# EAGLE board Layout (EAGLE 6.5.0)
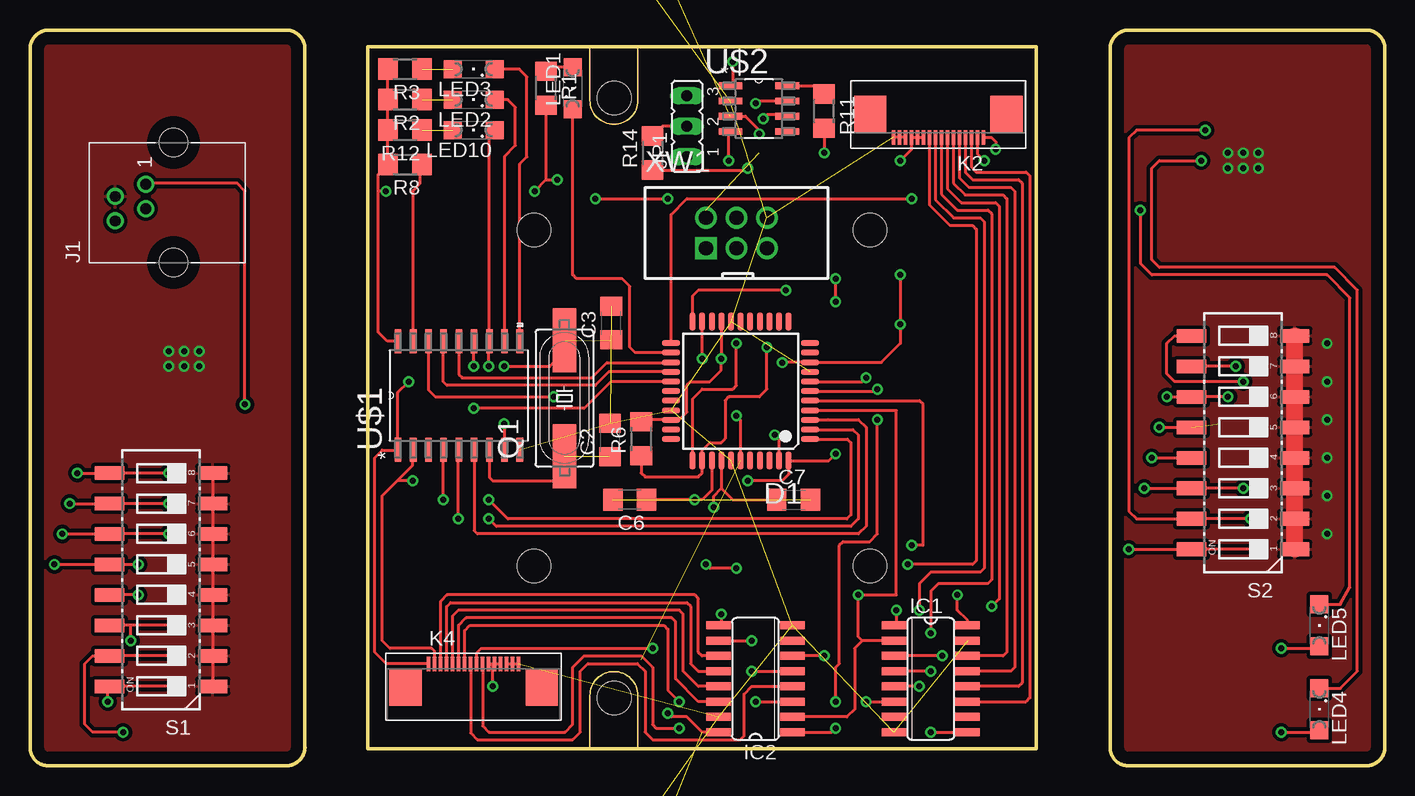
[diagram p0: board, top side]
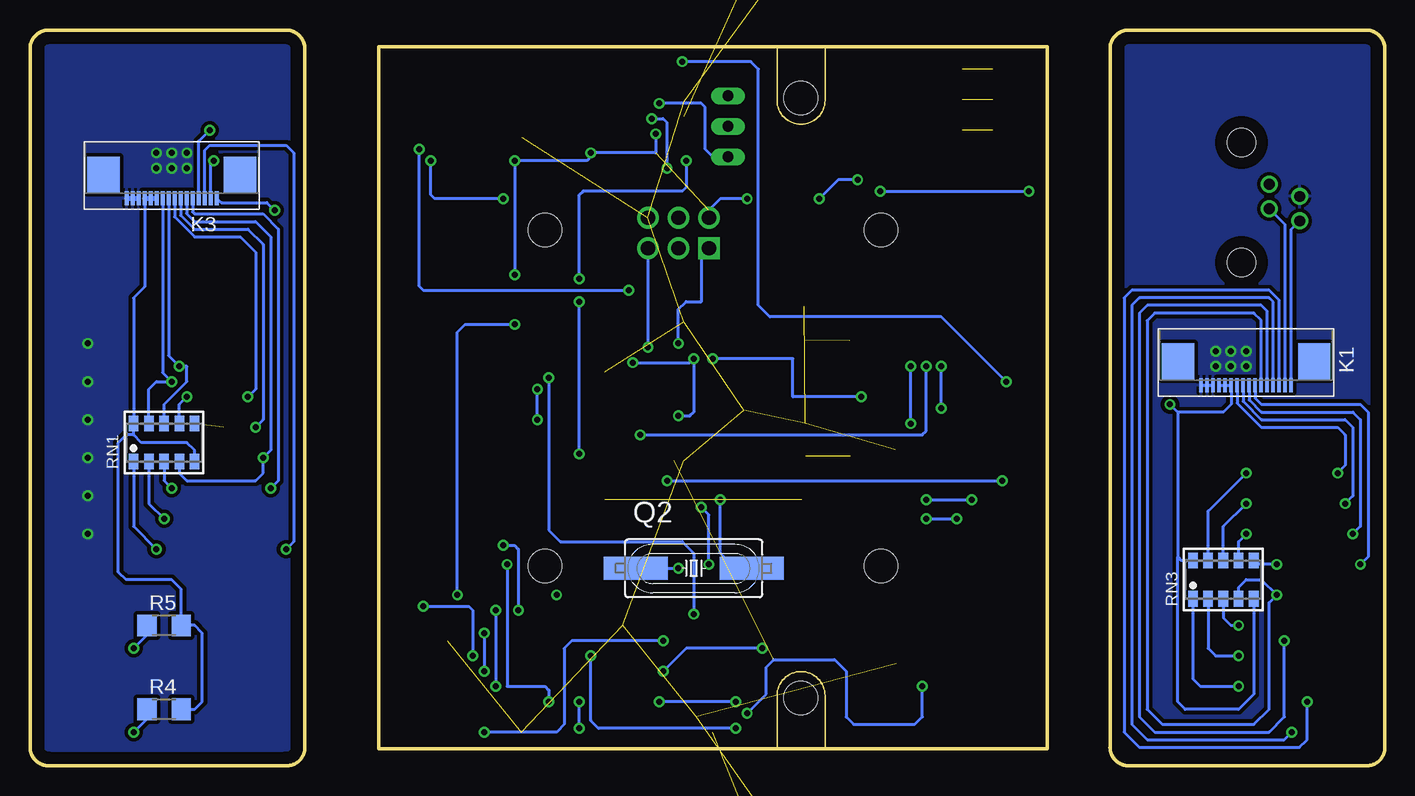
[diagram p1: board, bottom side, seen from below]

Size 112.91 x 61.32 mm. Coordinates in mm from the lower left corner, seen from the top.
Copper layers (1*16): Top 0.035mm / dielectric 1.5mm / Bottom 0.035mm
Design rules "default": minimum track width 10mil, minimum drill 24mil, track to track 8mil, track to pad 8mil, pad to pad 8mil, via to via 8mil, smd to smd 8mil, copper to edge 40mil, drill to drill 8mil, minimum pad ring 10mil, minimum via ring 8mil, stop-mask expansion 4mil, vias tented up to drill 0mil, thermal gap 10mil

## Footprints (pad centres in the part's own frame; a part is rotated, then mirrored left to right if it is on the bottom)
C1206 = smd 1.6 x 1.8: 1 -1.4,0; 2 1.4,0
TQFP44A = smd 1.5 x 0.5: 1 -5.8,4; 2 -5.8,3.2; 3 -5.8,2.4; 4 -5.8,1.6; 5 -5.8,0.8; 6 -5.8,0; 7 -5.8,-0.8; 8 -5.8,-1.6; 9 -5.8,-2.4; 10 -5.8,-3.2; 11 -5.8,-4; 23 5.8,-4; 24 5.8,-3.2; 25 5.8,-2.4; 26 5.8,-1.6; 27 5.8,-0.8; 28 5.8,0; 29 5.8,0.8; 30 5.8,1.6; 31 5.8,2.4; 32 5.8,3.2; 33 5.8,4 | smd 0.5 x 1.5: 12 -4,-5.8; 13 -3.2,-5.8; 14 -2.4,-5.8; 15 -1.6,-5.8; 16 -0.8,-5.8; 17 0,-5.8; 18 0.8,-5.8; 19 1.6,-5.8; 20 2.4,-5.8; 21 3.2,-5.8; 22 4,-5.8; 34 4,5.8; 35 3.2,5.8; 36 2.4,5.8; 37 1.6,5.8; 38 0.8,5.8; 39 0,5.8; 40 -0.8,5.8; 41 -1.6,5.8; 42 -2.4,5.8; 43 -3.2,5.8; 44 -4,5.8
SO16 = smd 0.66 x 2.032: 1 -4.445,-3.073; 2 -3.175,-3.073; 3 -1.905,-3.073; 4 -0.635,-3.073; 5 0.635,-3.073; 6 1.905,-3.073; 7 3.175,-3.073; 8 4.445,-3.073; 9 4.445,3.073; 10 3.175,3.073; 11 1.905,3.073; 12 0.635,3.073; 13 -0.635,3.073; 14 -1.905,3.073; 15 -3.175,3.073; 16 -4.445,3.073
615004143821 = drill 0.9: 1 1.53,2.3; 2 0.51,4.84; 3 -0.51,2.3; 4 -1.53,4.84 | hole 2.36: -5,0; 5,0
JP2 = drill 0.914 long: 1 -2.54,0; 2 0,0; 3 2.54,0
68711614522 = smd 0.3 x 1.2: 1 -3.75,0.6; 2 -3.25,0.6; 3 -2.75,0.6; 4 -2.25,0.6; 5 -1.75,0.6; 6 -1.25,0.6; 7 -0.75,0.6; 8 -0.25,0.6; 9 0.25,0.6; 10 0.75,0.6; 11 1.25,0.6; 12 1.75,0.6; 13 2.25,0.6; 14 2.75,0.6; 15 3.25,0.6; 16 3.75,0.6 | smd 2.7 x 3: Z1 -5.68,-1.38; Z2 5.68,-1.38
SML1206 = smd 1.5 x 1.5: A 1.75,0; C -1.75,0
HC49 = smd 5.334 x 1.93: 1 -4.826,0; 2 4.826,0
R1206 = smd 1.6 x 1.803: 1 -1.422,0; 2 1.422,0
745-10 = smd 0.8 x 1.3: 1 -2.54,-1.587; 2 -1.27,-1.587; 3 0,-1.587; 4 1.27,-1.587; 5 2.54,-1.587; 6 2.54,1.587; 7 1.27,1.587; 8 0,1.587; 9 -1.27,1.587; 10 -2.54,1.587
CTS-219-08 = smd 1.13 x 2.44: 1 -8.89,-4.3; 2 -6.35,-4.3; 3 -3.81,-4.3; 4 -1.27,-4.3; 5 1.27,-4.3; 6 3.81,-4.3; 7 6.35,-4.3; 8 8.89,-4.3; 9 8.89,4.3; 10 6.35,4.3; 11 3.81,4.3; 12 1.27,4.3; 13 -1.27,4.3; 14 -3.81,4.3; 15 -6.35,4.3; 16 -8.89,4.3
SOIC127P1030X265-18N = smd 1.981 x 0.559: 1 -4.521,5.08; 2 -4.521,3.81; 3 -4.521,2.54; 4 -4.521,1.27; 5 -4.521,0; 6 -4.521,-1.27; 7 -4.521,-2.54; 8 -4.521,-3.81; 9 -4.521,-5.08; 10 4.521,-5.08; 11 4.521,-3.81; 12 4.521,-2.54; 13 4.521,-1.27; 14 4.521,0; 15 4.521,1.27; 16 4.521,2.54; 17 4.521,3.81; 18 4.521,5.08
SOIC127P600X175-8N = smd 1.981 x 0.559: 1 -2.362,1.905; 2 -2.362,0.635; 3 -2.362,-0.635; 4 -2.362,-1.905; 5 2.362,-1.905; 6 2.362,-0.635; 7 2.362,0.635; 8 2.362,1.905
RND_455-00879_X4 = hole 2.8: -14,-13.54; 14,-13.54; -14,14.46; 14,14.46; -25,7.78; 25,7.78
WSL = drill 1.2 square: 1 -2.54,-1.27 | drill 1.2: 2 -2.54,1.27; 3 0,-1.27; 4 0,1.27; 5 2.54,-1.27; 6 2.54,1.27

## Placement (x,y rotation side)
C1  100nF  [C1206]  50.93,67.58 180 top  (outside the outline)
C2  22pF  [C1206]  48.35,27.15 90 top
C3  22pF  [C1206]  48.44,36.9 90 top
C4  100nF  [C1206]  50.3,76.47 0 top  (outside the outline)
C5  100nF  [C1206]  50.3,-7.98 180 top  (outside the outline)
C6  22pF  [C1206]  49.98,22.18 180 top
C7  22pF  [C1206]  63.63,22.18 0 top
D1  [TQFP44A]  59.22,31.23 180 top
IC1  74LS165D  [SO16]  75.06,7.26 270 top
IC2  74LS165D  [SO16]  60.46,7.26 90 top
J1  [615004143821]  11.95,46.94 90 top
JP1  [JP2]  54.74,53.29 90 top
K1  68711614522  [68711614522]  11.57,32.31 180 bottom
K2  68711614522  [68711614522]  75.7,52.98 180 top
K3  68711614522  [68711614522]  101.1,47.9 180 bottom
K4  68711614522  [68711614522]  36.96,7.89 0 top
LED1  [SML1206]  45.22,56.47 90 top
LED2  [SML1206]  36.96,55.52 180 top
LED3  [SML1206]  36.96,58.06 180 top
LED4  [SML1206]  107.45,4.72 270 top
LED5  [SML1206]  107.45,11.7 270 top
LED10  [SML1206]  36.96,52.98 180 top
Q1  HC49-U - 16MHz  [HC49]  44.54,30.64 90 top
Q2  HC49-U - xMHz  [HC49]  57.6,16.46 0 bottom
R1  560R  [R1206]  43,56.47 270 top
R2  560R  [R1206]  31.25,55.52 180 top
R3  560R  [R1206]  31.25,58.06 180 top
R4  560R  [R1206]  101.73,4.72 0 bottom
R5  560R  [R1206]  101.73,11.7 0 bottom
R6  10k  [R1206]  50.93,27.26 90 top
R8  10k  [R1206]  31.25,50.12 180 top
R11  10k  [R1206]  66.17,54.56 270 top
R12  560R  [R1206]  31.25,52.98 180 top
R14  120R  [R1206]  51.89,51.07 90 top
RN1  [745-10]  101.73,26.94 0 bottom
RN3  [745-10]  13.47,15.51 0 bottom
S1  219-08  [CTS-219-08]  10.93,15.51 90 top
S2  219-08  [CTS-219-08]  101.1,26.94 90 top
U$1  MCP2515-E/SO  [SOIC127P1030X265-18N]  35.74,30.86 90 top
U$2  MCP2551-E/SN  [SOIC127P600X175-8N]  60.73,54.77 0 top
U$3  [RND_455-00879_X4]  56.46,30.66 90 top
U$4  [25X25_BEST]  95.38,8.52 100 top
XW1  [WSL]  58.87,44.4 0 top

## Library data of the parts
C1-C7 R1-R6 R8 R11 R12 R14 = rcl
D1 = AVR - XMEGA
IC1 IC2 = 74xx-us
J1 = InputOutputIO (rev18b)
JP1 = jumper
K1-K4 = Wurth_FPC_FFC
LED1-LED5 LED10 = led
Q1 Q2 = Quarz - HC49UP
RN1 RN3 = resistor-array
S1 S2 = switch-dil; OC_FARNELL: unknown; OC_NEWARK: unknown
U$1 = Microchip_By_element14_Batch_1; DESCRIPTION: IC CAN CONTROLLER; MPN: MCP2515-E/SO; OC_FARNELL: 1605565; OC_NEWARK: 29H7134; PACKAGE: SOIC-18; SUPPLIER: Microchip
U$2 = Microchip_By_element14_Batch_1; DESCRIPTION: High-Speed CAN Transceiver; MPN: MCP2551-E/SN; OC_FARNELL: 1467746; OC_NEWARK: 92C4186; PACKAGE: SOIC-8; SUPPLIER: Microchip
U$3 = RND 455-00879
U$4 = !!!Platinen_Logo!!!
XW1 = Atmel - ISP_6   (AVR ISP MKII)

## Nets
74XX165_CLK: D1.4 IC1.2 IC2.2
74XX165_OUT: D1.7 IC2.9
74XX165_SH/LD_IC1: D1.5 IC1.1
74XX165_SH/LD_IC2: D1.6 IC2.1
CAN_BITRATE_0: IC2.11 K4.3
CAN_BITRATE_1: IC2.12 K4.4
CAN_BITRATE_2: IC2.13 K4.5
CAN_BITRATE_3: IC2.14 K4.6
CAN_BITRATE_4: IC2.3 K4.7
CAN_BITRATE_5: IC2.4 K4.8
CAN_BITRATE_6: IC2.5 K4.9
CAN_BITRATE_7: IC2.6 K4.10
DEBUG_RXD: D1.22 K2.1
DEBUG_TXD: D1.23 K2.2
FRONT_DEBUG_RXD: J1.4 K1.1
FRONT_DEBUG_TXD: J1.3 K1.2
FRONT_GND: J1.2 K1.14 K1.15 K1.16 S1.1 S1.2 S1.3 S1.4 S1.5 S1.6 S1.7 S1.8
FRONT_VCC: J1.1 K1.11 K1.12 K1.13 RN3.5 RN3.10
GND: C1.2 C2.2 C3.2 C4.1 C5.2 D1.8 D1.18 D1.30 D1.38 IC1.8 IC1.15 IC2.8 IC2.15 K2.14 K2.15 K2.16 K4.14 K4.15 K4.16 U$1.9 U$2.2 XW1.6
MCP2515_CLKOUT: U$1.3
MCP2515_INT: D1.43 LED10.C U$1.12
MCP2515_OSC1: C3.1 Q1.2 U$1.8
MCP2515_OSC2: C2.1 Q1.1 U$1.7
MCP2515_RESET: R8.1 U$1.17
MCP2515_RX0BF: LED2.C U$1.11
MCP2515_RX1BF: LED3.C U$1.10
MCP2515_RXCAN: D1.44 K4.2 U$1.2 U$2.4
MCP2515_TX0RTS: D1.1 U$1.4
MCP2515_TX1RTS: D1.2 U$1.5
MCP2515_TX2RTS: D1.3 U$1.6
MCP2515_TXCAN: K4.1 U$1.1 U$2.1
MCP2551_CANH: JP1.1 U$2.7
MCP2551_CANL: R14.1 U$2.6
MCP2551_RS: R11.1 U$2.8
MCP2551_VREF: U$2.5
N$1: LED2.A R2.1
N$2: IC1.9 IC2.10
N$3: LED3.A R3.1
N$4: K3.3 RN1.1 S2.16
N$5: K3.4 RN1.2 S2.15
N$6: K3.5 RN1.3 S2.14
N$7: K3.6 RN1.4 S2.13
N$8: K3.7 RN1.6 S2.12
N$9: K3.8 RN1.7 S2.11
N$11: LED10.A R12.1
N$12: JP1.2 R14.2
N$13: D1.40
N$14: D1.41
N$15: C6.1 D1.36 Q2.2
N$16: C7.1 D1.37 Q2.1
N$17: C6.2 C7.2
N$18: D1.42
N$19: K3.9 RN1.8 S2.10
N$20: D1.28
N$21: D1.29
N$22: K1.3 RN3.1 S1.16
N$23: K1.4 RN3.2 S1.15
N$24: K1.5 RN3.3 S1.14
N$25: K1.6 RN3.4 S1.13
N$26: K1.7 RN3.6 S1.12
N$27: K1.8 RN3.7 S1.11
N$28: K1.9 RN3.8 S1.10
N$29: K1.10 RN3.9 S1.9
N$30: K3.10 RN1.9 S2.9
N$31: D1.35 R6.1 XW1.5
N$32: LED1.A R1.1
N$33: K3.1 LED5.C
N$34: K3.2 LED4.C
N$35: LED4.A R4.1
N$36: LED5.A R5.1
NODE_ID_0: IC1.11 K2.3
NODE_ID_1: IC1.12 K2.4
NODE_ID_2: IC1.13 K2.5
NODE_ID_3: IC1.14 K2.6
NODE_ID_4: IC1.3 K2.7
NODE_ID_5: IC1.4 K2.8
NODE_ID_6: IC1.5 K2.9
NODE_ID_7: IC1.6 K2.10
REAR_GND: K3.14 K3.15 K3.16 S2.1 S2.2 S2.3 S2.4 S2.5 S2.6 S2.7 S2.8
REAR_VCC: K3.11 K3.12 K3.13 R4.2 R5.2 RN1.5 RN1.10
SPI_CHIP_SELECT: D1.21 U$1.16
SPI_MISO: D1.26 U$1.15
SPI_MOSI: D1.25 U$1.14
SPI_SCK: D1.27 U$1.13
SPI_SLAVE_SELECT_HW: D1.24 LED1.C
VCC: C1.1 C4.2 C5.1 D1.9 D1.19 D1.31 D1.39 IC1.16 IC2.16 K2.11 K2.12 K2.13 K4.11 K4.12 K4.13 R1.2 R2.2 R3.2 R6.2 R8.2 R11.2 R12.2 U$1.18 U$2.3 XW1.2
XMEGA_PDI_DATA: D1.34 XW1.1

## Tracks (layer width: path | path; a pad name or v marks a point on that pad's centre or on a via)
74XX165_CLK  (via drill 0.5)
  Top 0.254: 69.35,10.43 68.71,9.8 68.71,4.72 68.08,4.08 IC2.2 | IC1.2 69.35,10.43 | 69.35,10.43 69.03,10.75 v69.03,14.24 72.21,14.24 72.21,29.62 D1.4
74XX165_OUT  (via drill 0.5)
  Top 0.254: D1.7 69.35,32.02 v69.67,32.34 | v57.6,12.65 57.6,11.92 IC2.9
  Bottom 0.254: v69.67,32.34 69.67,19.64 68.71,18.69 58.56,18.69 57.6,17.73 v57.6,12.65
74XX165_SH/LD_IC1  (via drill 0.5)
  Top 0.254: 65.03,30.43 D1.5 74.12,30.43 74.43,30.12 74.43,18.37 v73.48,18.37 | v72.21,12.97 72.21,11.92 IC1.1
  Bottom 0.254: v73.48,18.37 72.53,18.37 72.21,18.05 v72.21,12.97
74XX165_SH/LD_IC2  (via drill 0.5)
  Top 0.254: IC2.1 66.81,2.81 v67.13,3.13 | v67.13,5.35 67.13,8.21 67.45,8.52 67.45,18.37 67.76,18.69 69.98,18.69 70.62,19.32 v70.62,28.85 | D1.6 70.46,31.23 v70.62,31.39
  Bottom 0.254: v67.13,3.13 v67.13,5.35 | v70.62,28.85 v70.62,31.39
CAN_BITRATE_0
  Top 0.254: IC2.11 56.01,9.16 55.7,9.48 55.7,13.92 55.38,14.24 34.74,14.24 34.21,13.71 K4.3
CAN_BITRATE_1
  Top 0.254: K4.4 34.71,13.26 35.06,13.61 54.75,13.61 55.06,13.29 55.06,8.52 55.7,7.89 IC2.12
CAN_BITRATE_2
  Top 0.254: IC2.13 55.7,6.62 54.43,7.89 54.43,12.65 54.11,12.97 35.69,12.97 35.21,12.49 K4.5
CAN_BITRATE_3
  Top 0.254: IC2.14 55.7,5.35 53.79,7.26 53.79,12.02 53.48,12.34 36.33,12.34 35.71,11.72 K4.6
CAN_BITRATE_4  (via drill 0.5)
  Top 0.254: K4.7 36.21,11.27 36.65,11.7 52.84,11.7 53.16,11.38 53.16,6.3 v54.11,5.35 | v60.46,5.35 IC2.3
  Bottom 0.254: v54.11,5.35 v60.46,5.35
CAN_BITRATE_5
  Top 0.254: K4.8 36.71,2.74 37.28,2.18 45.22,2.18 45.86,2.81 45.86,7.89 46.49,8.52 50.62,8.52 51.25,7.89 51.25,2.81 51.89,2.18 59.19,2.18 59.51,2.49 59.51,5.98 60.14,6.62 IC2.4
CAN_BITRATE_6  (via drill 0.5)
  Top 0.254: K4.9 37.21,9.41 37.6,9.8 v51.89,9.8 | v60.14,7.89 IC2.5
  Bottom 0.254: v51.89,9.8 58.24,9.8 v60.14,7.89
CAN_BITRATE_7  (via drill 0.5)
  Top 0.254: K4.10 37.71,3.33 38.24,2.81 44.58,2.81 45.22,3.45 45.22,8.21 46.17,9.16 50.93,9.16 51.89,8.21 51.89,3.45 52.2,3.13 v54.11,3.13 | v66.17,9.16 IC2.6
  Bottom 0.254: v54.11,3.13 65.54,3.13 66.17,3.76 v66.17,9.16
DEBUG_RXD  (via drill 0.5)
  Top 0.254: K2.1 80.11,52.38 80.46,52.02 v80.46,51.39 | v63,39.64 55.7,39.64 55.22,39.16 D1.22
  Bottom 0.254: v63,39.64 80.15,39.64 80.46,39.96 v80.46,51.39
DEBUG_TXD  (via drill 0.5)
  Top 0.254: D1.23 53.42,45.93 54.75,47.26 v73.48,47.26 | K2.2 78.95,51 v79.51,50.44
  Bottom 0.254: v73.48,47.26 79.19,47.26 79.51,47.58 v79.51,50.44
FRONT_DEBUG_RXD
  Bottom 0.254: K1.1 7.82,44.7 J1.4
FRONT_DEBUG_TXD
  Bottom 0.254: K1.2 8.32,45.1 J1.3
FRONT_GND  (via drill 0.5)
  Top 0.254: S1.8 S1.7 S1.6 S1.5 S1.4 S1.3 S1.2 S1.1
  Bottom 0.254: K1.16 K1.15 K1.14
  other vias: 14.1,33.29 14.1,34.56 12.83,34.56 12.83,33.29 11.56,33.29 11.56,34.56
  pour Top (isolate 0.305): 23.63,61.87 23.63,-1 -0.5,-1 -0.5,61.87
  pour Bottom (isolate 0.305): 23.63,61.87 23.63,-1 -0.5,-1 -0.5,61.87
FRONT_VCC  (via drill 0.5)
  Top 0.254: v17.92,30.12 17.92,47.9 17.28,48.53 9.71,48.53 J1.1
  Bottom 0.254: K1.13 K1.12 K1.11 12.82,30.13 13.47,29.48 17.28,29.48 | 17.28,29.48 v17.92,30.12 | 17.28,29.48 17.28,17.42 | RN3.10 16.96,17.1 17.28,17.42 | RN3.5 10.93,5.98 12.2,4.72 16.64,4.72 17.28,5.35 17.28,17.42
GND  (17 unrouted)
  Top 0.254: K4.14 K4.15 K4.16 | K2.14 K2.15 K2.16
MCP2515_INT  (via drill 0.5)
  Top 0.254: LED10.C 38.28,52.54 U$1.12 38.24,35.34 v38.24,33.29 | D1.43 62.42,27.21 v62.05,27.58
  Bottom 0.254: v62.05,27.58 38.55,27.58 38.24,27.89 v38.24,33.29
MCP2515_OSC1  (via drill 0.5)  (1 unrouted)
  Top 0.254: 48.41,35.46 C3.1 | 44.58,32.97 44.58,34.56 | 44.58,34.56 44.58,35.42 Q1.2 | U$1.8 39.55,28.48 v39.5,28.53 | v39.5,33.29 43.32,33.29 44.58,34.56
  Bottom 0.254: v39.5,28.53 v39.5,33.29
MCP2515_OSC2  (1 unrouted)
  Top 0.254: 48.28,25.81 C2.1 | Q1.1 44.31,25.3 | 44.31,25.3 43.63,23.77 | U$1.7 38.28,24.04 38.55,23.77 44.27,23.77 44.27,25.25 44.31,25.3
MCP2515_RESET
  Top 0.254: U$1.17 31.93,47.94 32.52,48.53 32.52,49.97 R8.1
MCP2515_RX0BF
  Top 0.254: U$1.11 39.55,50.8 40.46,51.7 40.46,54.88 39.82,55.52 LED2.C
MCP2515_RX1BF
  Top 0.254: U$1.10 40.82,50.16 41.41,50.75 41.41,57.42 40.78,58.06 LED3.C
MCP2515_RXCAN  (via drill 0.5)
  Top 0.254: K4.2 33.71,9.55 33.47,9.8 29.98,9.8 29.35,10.43 29.35,22.5 30.61,23.77 | 30.61,23.77 31.89,25.04 31.89,26.3 U$1.2 | v67.13,25.99 66.56,25.43 D1.44 63.22,24.3 62.68,23.77 v59.82,23.77 | v67.13,38.69 v67.13,40.59 | v58.24,50.44 58.24,52.73 U$2.4 | v31.89,23.77 30.61,23.77
  Bottom 0.254: v67.13,25.99 v67.13,38.69 | v67.13,40.59 67.13,47.58 66.81,47.9 58.56,47.9 58.24,48.21 v58.24,50.44 | v59.82,23.77 v31.89,23.77
MCP2515_TX0RTS  (via drill 0.5)
  Top 0.254: D1.1 68.11,27.23 68.4,26.94 68.4,20.91 68.08,20.59 39.82,20.59 v38.24,22.18 | v34.43,22.18 34.43,26.3 U$1.4
  Bottom 0.254: v38.24,22.18 v34.43,22.18
MCP2515_TX1RTS  (via drill 0.5)
  Top 0.254: D1.2 68.58,28.03 69.03,27.58 69.03,20.59 68.4,19.96 38.87,19.96 v38.24,20.59 | v35.69,20.59 35.69,26.3 U$1.5
  Bottom 0.254: v38.24,20.59 v35.69,20.59
MCP2515_TX2RTS
  Top 0.254: D1.3 66.47,28.83 66.49,28.85 69.03,28.85 69.67,28.21 69.67,19.96 69.03,19.32 37.28,19.32 37.01,19.59 U$1.6
MCP2515_TXCAN  (via drill 0.5)
  Top 0.254: K4.1 29.7,8.49 28.71,9.48 28.71,25.67 29.35,26.3 30.62,26.3 U$1.1 30.66,31.11 v31.57,32.02 | v58.56,58.69 58.56,56.86 U$2.1
  Bottom 0.254: v31.57,32.02 36.96,37.42 51.25,37.42 52.2,38.37 52.2,58.06 52.84,58.69 v58.56,58.69
MCP2551_CANH  (via drill 0.5)
  Top 0.254: U$2.7 60.67,55.4 v60.46,55.2
  Bottom 0.254: JP1.1 56.01,50.75 56.65,51.39 56.65,54.88 56.97,55.2 v60.46,55.2
MCP2551_CANL  (via drill 0.5)
  Top 0.254: R14.1 59.67,49.65 v59.82,49.8 | U$2.6 62.98,54.25 61.41,54.25 v61.09,53.93
  Bottom 0.254: v59.82,49.8 59.82,53.61 60.14,53.93 v61.09,53.93
MCP2551_RS
  Top 0.254: U$2.8 65.49,56.67 R11.1
N$1  (1 unrouted)
N$2  (via drill 0.5)
  Top 0.254: IC2.10 v60.14,10.43 | v75.06,2.81 IC1.9
  Bottom 0.254: v60.14,10.43 67.76,10.43 68.4,9.8 68.4,3.45 69.03,2.81 v75.06,2.81
N$3  (1 unrouted)
N$4  (via drill 0.5)
  Top 0.254: v91.57,18.05 S2.16 v102.37,18.05
  Bottom 0.254: K3.3 98.35,51.28 97.92,51.7 91.57,51.7 90.94,51.07 90.94,18.69 v91.57,18.05 | RN1.1 104.28,19.96 v102.37,18.05
N$5  (via drill 0.5)
  Top 0.254: v97.92,52.98 92.21,52.98 91.57,52.34 91.57,21.23 92.21,20.59 S2.15 v101.73,20.59
  Bottom 0.254: K3.4 98.85,52.05 v97.92,52.98 | RN1.2 103.01,21.86 v101.73,20.59
N$6  (via drill 0.5)
  Top 0.254: v92.84,23.13 S2.14 v101.1,23.13
  Bottom 0.254: K3.5 99.35,46.15 99.2,45.99 93.48,45.99 92.21,44.72 92.21,23.77 v92.84,23.13 | RN1.3 101.73,23.77 v101.1,23.13
N$7  (via drill 0.5)
  Top 0.254: v93.48,25.67 S2.13
  Bottom 0.254: K3.6 99.85,46.01 99.2,45.36 94.12,45.36 92.84,44.09 92.84,26.3 v93.48,25.67 93.48,24.4 94.12,23.77 99.83,23.77 100.46,24.4 RN1.4
N$8  (via drill 0.5)  (1 unrouted)
  Top 0.254: v94.12,28.21 S2.12
  Bottom 0.254: K3.7 100.35,45.88 99.2,44.72 94.75,44.72 93.48,43.45 93.48,28.85 v94.12,28.21
N$9  (via drill 0.5)
  Top 0.254: v94.75,30.75 S2.11 v99.83,30.75
  Bottom 0.254: K3.8 100.85,45.74 99.2,44.09 95.39,44.09 94.12,42.82 94.12,31.39 v94.75,30.75 | RN1.7 100.46,30.12 v99.83,30.75
N$11  (1 unrouted)
N$12
  Top 0.254: JP1.2 52.69,53.29 R14.2
N$15  (via drill 0.5)
  Top 0.254: D1.36 56.82,22.98 56.01,22.18 v55.38,22.18 C6.1
  Bottom 0.254: Q2.2 54.11,16.46 55.38,17.73 v55.38,22.18
N$16  (via drill 0.5)
  Top 0.254: D1.37 57.62,23.12 | 57.62,23.12 58.56,22.18 C7.1 | v58.87,16.46 56.65,16.46 v56.33,16.78 | v56.97,21.54 56.97,22.47 57.62,23.12
  Bottom 0.254: Q2.1 v58.87,16.46 | v56.33,16.78 56.33,20.91 v56.97,21.54
N$17  (1 unrouted)
N$19  (via drill 0.5)
  Top 0.254: v100.46,33.29 S2.10
  Bottom 0.254: K3.9 101.35,34.18 v100.46,33.29 99.83,33.29 99.83,32.02 101.73,30.12 RN1.8
N$22  (via drill 0.5)
  Top 0.254: v12.2,6.62 S1.16 6.48,6.48 v6.48,5.35
  Bottom 0.254: RN3.1 16.01,7.26 15.37,6.62 v12.2,6.62 | K1.3 8.82,38.8 9.66,39.64 21.09,39.64 21.72,39.01 21.72,2.81 20.46,1.54 7.12,1.54 6.48,2.18 v6.48,5.35
N$23  (via drill 0.5)
  Top 0.254: v12.2,9.16 S1.15 5.21,9.16 4.58,8.52 4.58,3.45 5.21,2.81 v7.75,2.81
  Bottom 0.254: RN3.2 14.74,9.8 14.11,9.16 v12.2,9.16 | K1.4 9.32,38.66 9.66,39.01 20.46,39.01 21.09,38.37 21.09,3.45 19.82,2.18 8.39,2.18 v7.75,2.81
N$24  (via drill 0.5)
  Top 0.254: v12.2,11.7 8.39,11.7 | 8.39,11.7 S1.14 | v8.39,10.43 8.39,11.7
  Bottom 0.254: RN3.3 13.47,12.34 12.84,11.7 v12.2,11.7 | K1.5 9.82,37.9 10.29,38.37 19.82,38.37 20.46,37.73 20.46,4.08 19.18,2.81 9.66,2.81 8.39,4.08 v8.39,10.43
N$25  (via drill 0.5)
  Top 0.254: v9.02,14.24 S1.13
  Bottom 0.254: RN3.4 12.2,14.88 11.57,15.51 10.29,15.51 v9.02,14.24 9.66,13.61 9.66,4.72 10.93,3.45 18.55,3.45 19.82,4.72 19.82,37.1 19.18,37.73 10.93,37.73 10.32,37.12 K1.6
N$26  (via drill 0.5)
  Top 0.254: v9.02,16.78 S1.12 v2.04,16.78
  Bottom 0.254: v9.02,16.78 10.61,16.78 RN3.6 | K1.7 10.82,30.64 10.29,30.12 2.04,30.12 1.41,29.48 1.41,17.42 v2.04,16.78
N$27  (via drill 0.5)
  Top 0.254: v11.57,19.32 S1.11 v2.68,19.32
  Bottom 0.254: RN3.7 12.2,18.69 v11.57,19.32 | K1.8 11.32,30.51 10.29,29.48 2.68,29.48 2.04,28.85 2.04,19.96 v2.68,19.32
N$28  (via drill 0.5)
  Top 0.254: v11.57,21.86 S1.10 v3.31,21.86
  Bottom 0.254: RN3.8 13.47,19.96 v11.57,21.86 | K1.9 11.82,30.37 10.29,28.85 3.31,28.85 2.68,28.21 2.68,22.5 v3.31,21.86
N$29  (via drill 0.5)
  Top 0.254: v11.57,24.4 S1.9 v3.95,24.4
  Bottom 0.254: RN3.9 14.74,21.23 v11.57,24.4 | K1.10 12.32,30.23 10.29,28.21 3.95,28.21 3.31,27.58 3.31,25.04 v3.95,24.4
N$30  (via drill 0.5)
  Top 0.254: v101.1,32.02 95.39,32.02 94.75,32.66 94.75,35.2 95.39,35.83 S2.9
  Bottom 0.254: K3.10 101.85,32.77 v101.1,32.02 102.37,32.02 103.01,31.39 RN1.9
N$31  (via drill 0.5)
  Top 0.254: R6.1 50.93,24.4 51.25,24.08 55.7,24.08 56.01,24.4 D1.35 56.02,26.31 56.65,26.94 57.6,26.94 57.92,27.26 57.92,30.43 58.24,30.75 60.78,30.75 61.41,31.39 v61.41,34.88
  Bottom 0.254: XW1.5 v61.41,34.88
N$32
  Top 0.254: LED1.A 43.33,58.22 R1.1
N$33  (via drill 0.5)
  Top 0.254: LED5.C 109.2,13.45 109.99,14.88 109.99,39.01 108.09,40.91 93.48,40.91 92.53,41.86 v92.53,46.31
  Bottom 0.254: K3.1 97.31,47.26 97.29,47.26 96.97,46.94 93.16,46.94 v92.53,46.31
N$34  (via drill 0.5)
  Top 0.254: LED4.C 109.2,6.47 110.62,7.89 110.62,39.64 108.72,41.55 94.12,41.55 93.48,42.18 93.48,49.8 94.12,50.44 v97.61,50.44
  Bottom 0.254: K3.2 97.85,50.19 v97.61,50.44
N$35  (via drill 0.5)
  Top 0.254: v104.28,2.81 107.29,2.81 LED4.A
  Bottom 0.254: R4.1 103.16,3.93 v104.28,2.81
N$36  (via drill 0.5)
  Top 0.254: v104.28,9.8 107.29,9.8 LED5.A
  Bottom 0.254: R5.1 103.16,10.91 v104.28,9.8
NODE_ID_0
  Top 0.254: IC1.11 83,5.35 83.32,5.67 83.32,49.16 83,49.48 78.87,49.48 78.45,49.91 K2.3
NODE_ID_1
  Top 0.254: K2.4 77.95,49.45 78.56,48.85 82.37,48.85 82.68,48.53 82.68,6.94 82.37,6.62 IC1.12
NODE_ID_2
  Top 0.254: K2.5 77.45,49 78.24,48.21 81.73,48.21 82.05,47.9 82.05,8.21 81.73,7.89 IC1.13
NODE_ID_3
  Top 0.254: K2.6 76.95,48.55 77.92,47.58 81.1,47.58 81.42,47.26 81.42,9.48 81.1,9.16 IC1.14
NODE_ID_4  (via drill 0.5)
  Top 0.254: K2.7 76.45,48.1 77.61,46.94 80.46,46.94 80.78,46.62 80.78,13.92 v80.15,13.29 | v76.02,9.16 IC1.3
  Bottom 0.254: v80.15,13.29 76.34,13.29 76.02,12.97 v76.02,9.16
NODE_ID_5  (via drill 0.5)
  Top 0.254: K2.8 75.95,47.65 77.29,46.31 79.83,46.31 80.15,45.99 80.15,15.51 79.83,15.19 75.7,15.19 75.06,14.56 v75.06,11.07 | v75.06,7.89 IC1.4
  Bottom 0.254: v75.06,11.07 v75.06,7.89
NODE_ID_6  (via drill 0.5)
  Top 0.254: K2.9 75.45,47.19 76.97,45.67 79.19,45.67 79.51,45.36 79.51,16.46 79.19,16.15 75.06,16.15 74.11,15.19 v74.11,12.97 | v74.11,6.62 IC1.5
  Bottom 0.254: v74.11,12.97 v74.11,6.62
NODE_ID_7  (via drill 0.5)
  Top 0.254: K2.10 74.95,46.74 76.65,45.04 78.56,45.04 78.87,44.72 78.87,17.1 78.56,16.78 v73.16,16.78 | v69.67,5.35 IC1.6
  Bottom 0.254: v73.16,16.78 73.16,6.62 69.98,6.62 69.67,6.3 v69.67,5.35
REAR_GND  (via drill 0.5)
  Top 1.422: S2.1 S2.2 S2.3 S2.4 S2.5 S2.6 S2.7 S2.8
  Bottom 0.406: K3.16 K3.14
  other vias: 99.83,49.8 101.1,49.8 102.37,49.8 102.37,51.07 101.1,51.07 99.83,51.07 108.08,19.32 108.08,22.5 108.08,25.67 108.08,28.85 108.08,32.02 108.08,35.2
  pour Top (isolate 0.305): 113.8,62.5 113.8,-1 89.03,-1 89.03,62.5
  pour Bottom (isolate 0.305): 113.8,62.5 113.8,-1 89.03,-1 89.03,62.5
REAR_VCC
  Bottom 0.254: RN1.5 99.2,26.3 99.83,26.94 103.64,26.94 104.28,27.58 | 104.28,27.58 RN1.10 104.28,39.01 103.35,39.93 K3.13 | R4.2 99.2,4.72 98.56,5.35 98.56,11.07 99.2,11.7 R5.2 100.31,14.72 101.1,15.51 104.91,15.51 105.54,16.15 105.54,26.94 104.91,27.58 104.28,27.58
  Bottom 0.406: K3.13 K3.12 K3.11
SPI_CHIP_SELECT  (via drill 0.5)
  Top 0.254: U$1.16 33.2,31.34 33.79,30.75 v43.63,30.75 | v56.01,33.93 D1.21
  Bottom 0.254: v43.63,30.75 49.35,30.75 49.35,33.93 v56.01,33.93
SPI_MISO
  Top 0.254: D1.26 48.25,32.83 47.12,31.7 34.74,31.7 34.43,32.02 34.43,35.34 U$1.15
SPI_MOSI
  Top 0.254: U$1.14 35.74,32.61 36.01,32.34 46.81,32.34 48.08,33.61 53.4,33.61 D1.25
SPI_SCK  (via drill 0.5)
  Top 0.254: D1.27 48.4,32.03 46.17,29.8 v36.96,29.8 | v36.96,33.29 36.96,35.34 U$1.13
  Bottom 0.254: v36.96,29.8 v36.96,33.29
SPI_SLAVE_SELECT_HW
  Top 0.254: D1.24 50.43,34.43 49.98,34.88 49.98,39.96 49.35,40.59 45.54,40.59 45.22,40.91 LED1.C
VCC  (via drill 0.5)  (5 unrouted)
  Top 0.254: 29.66,52.81 R12.2 | R12.2 R2.2 R3.2 | K2.11 K2.12 K2.13 73.45,51.36 v72.53,50.44 | K4.11 K4.12 | K4.12 K4.13 | v72.53,40.91 v72.53,36.78 72.53,35.2 70.95,33.62 D1.9 62.7,33.62 v62.68,33.61 | R6.2 51.08,28.83 D1.31 53.44,28.85 54.11,28.85 54.75,29.48 54.75,31.7 55.06,32.02 56.65,32.02 57.6,32.97 v57.6,33.93 57.62,33.94 D1.19 | R11.2 v66.17,51.07 | v60.78,52.66 60.78,52.98 59.62,54.13 U$2.3 | IC1.16 78.14,12.12 77.29,12.97 v77.29,14.24 | D1.39 59.22,28.82 v58.87,29.16 | U$1.18 29.79,35.38 29.03,36.15 29.03,47.9 | 29.03,47.9 29.03,49.32 R8.2 R12.2 | R1.2 43,48.85 | 43,48.85 v42.04,47.9 | v29.66,47.9 29.03,47.9 | 43,48.85 v43.95,48.85 | v47.12,47.26 v53.16,47.26 | IC2.16 56.01,2.81 54.75,4.08 53.48,4.08 v53.16,4.4 | v38.55,6.62 38.55,8.33 K4.12
  Bottom 0.254: v72.53,40.91 v72.53,50.44 66.49,50.44 66.17,50.75 v66.17,51.07 60.78,51.07 v60.78,52.66 | XW1.2 56.33,46.31 55.38,47.26 v53.16,47.26 | v77.29,14.24 77.29,36.15 76.65,36.78 v72.53,36.78 | v42.04,47.9 v29.66,47.9 | v43.95,48.85 45.54,48.85 v47.12,47.26 | v53.16,4.4 51.57,5.98 51.57,8.21 50.93,8.84 45.86,8.84 44.9,7.89 44.9,4.08 44.27,3.45 39.19,3.45 38.55,4.08 v38.55,6.62 | v58.87,29.16 57.92,29.16 57.6,29.48 v57.6,33.93 57.92,33.61 v62.68,33.61
XMEGA_PDI_DATA  (via drill 0.5)
  Top 0.254: D1.34 55.22,30.59 56.01,31.39 58.56,31.39 58.87,31.7 v58.87,35.2
  Bottom 0.254: XW1.1 56.97,42.5 56.97,38.69 58.24,38.69 58.87,38.05 v58.87,35.2

## Text on the board
Beschriftungen: TxD | RxD